# Altium PCB WifiAndLcd.PcbDoc
Units mil, origin at the board's own origin, x right, y up, seen from the top; angles counter-clockwise.
Board outline 4724.41 x 2913.39 mil, 2 copper layers (Top Layer, Bottom Layer); 130 components, 126 nets, 501 pads, 252 vias.
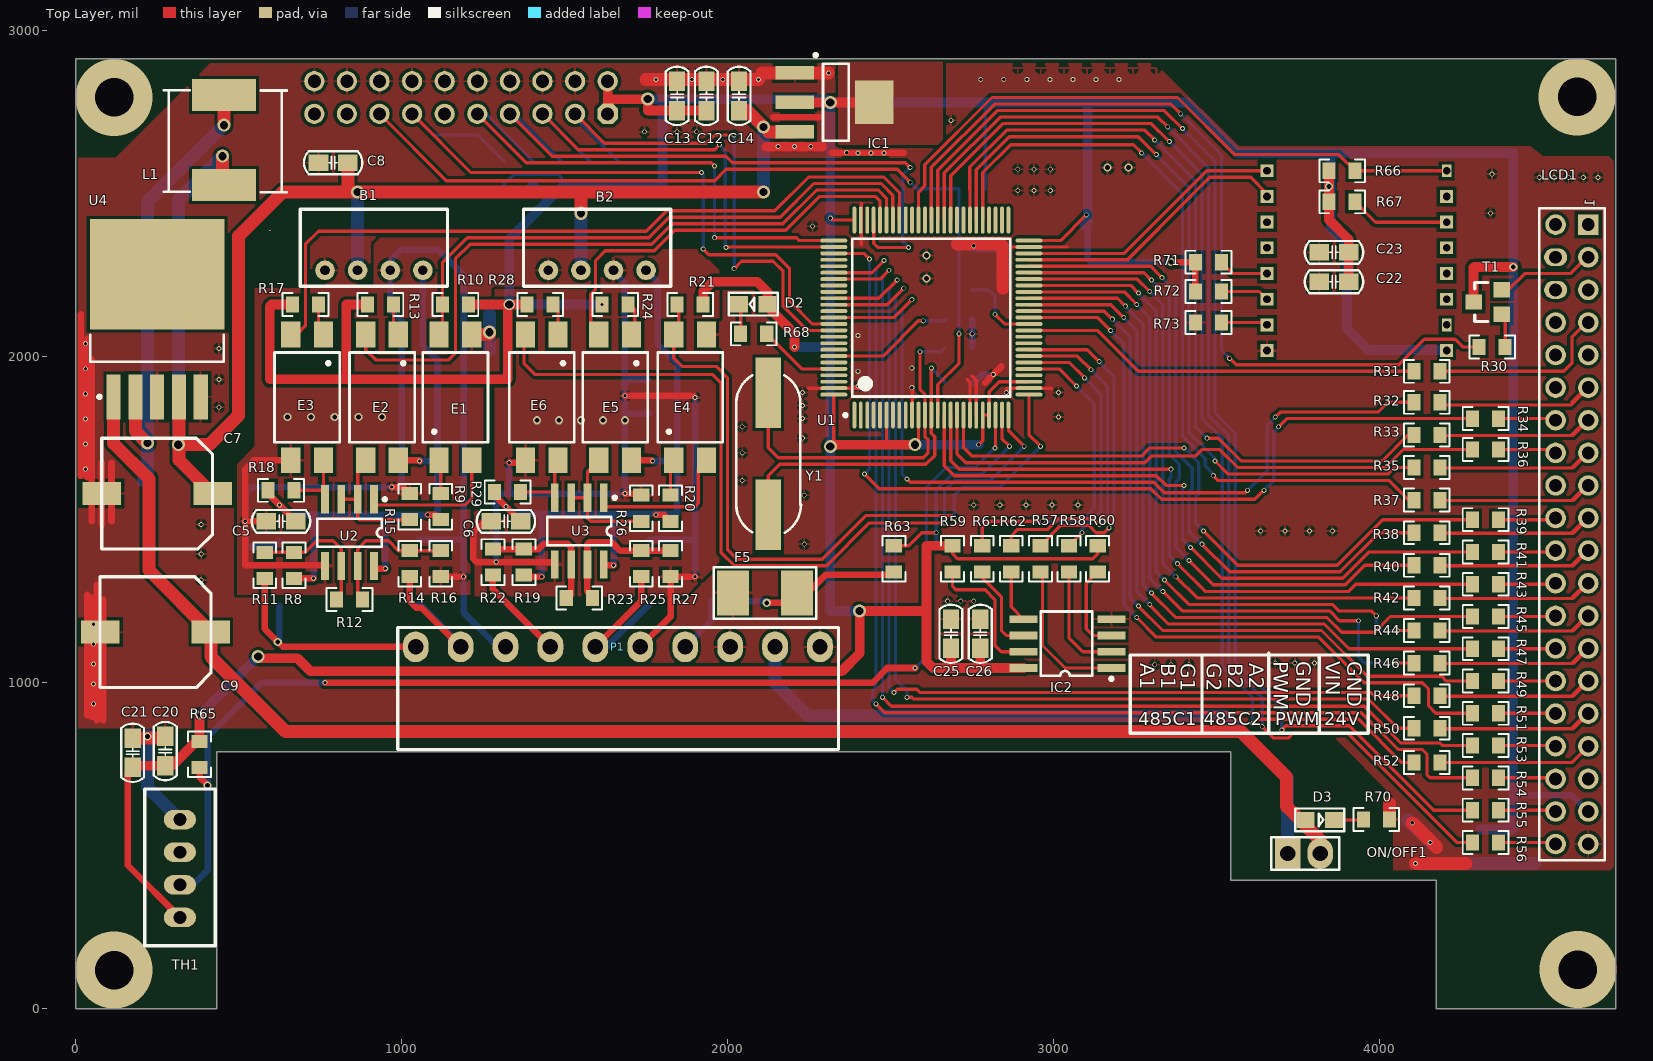
[diagram p0: Top Layer view]
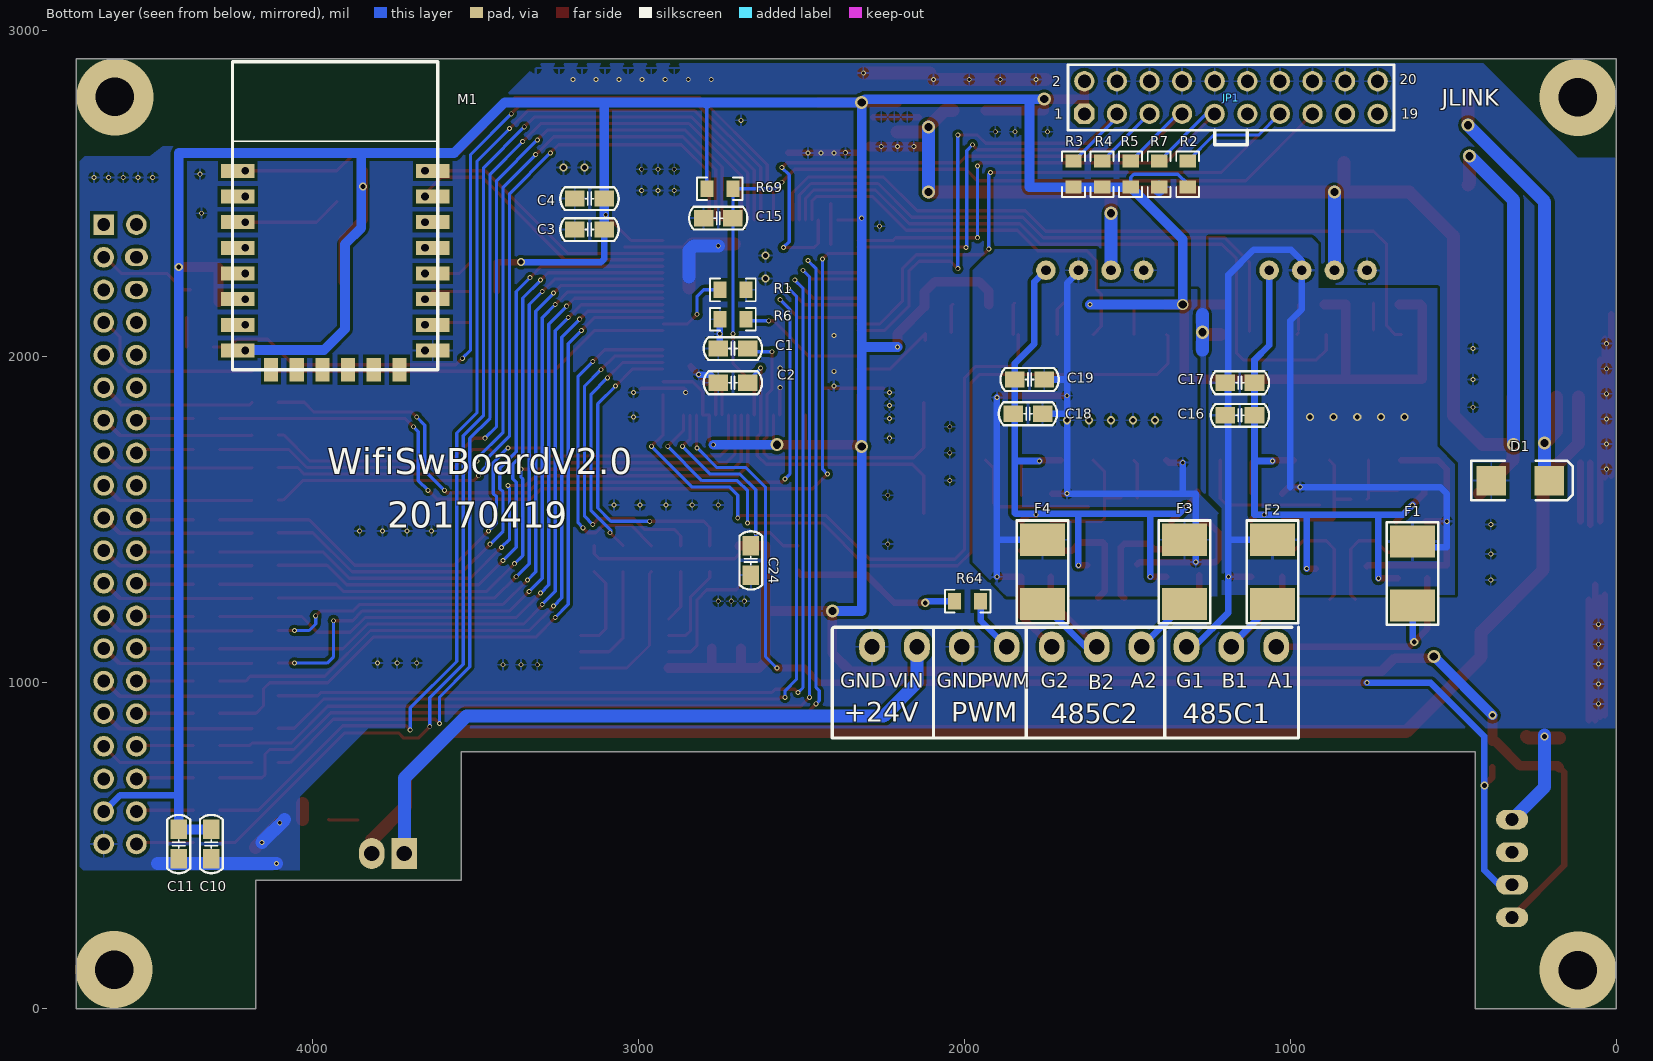
[diagram p1: Bottom Layer view, seen from below]

## Layer stack, top to bottom
Top Layer: signal copper 1.4
Dielectric: dielectric 12.6, FR-4, Dk 4.8
Bottom Layer: signal copper 1.4

## Board outline
0,0 0,2913.39 4724.41,2913.39 4724.41,0 4173.23,0 4173.23,393.7 3543.31,393.7 3543.31,787.4 433.07,787.4 433.07,0

## Design rules (kind name [scope] priority, off if disabled: settings)
Clearance [All] p1: gap=7
PlaneConnect [All] p1: planeconnectstyle=Direct reliefexpansion=20 reliefentries=4 reliefconductorwidth=10 reliefairgap=10
PolygonConnect [All] p1: connectstyle=Relief reliefconductorwidth=7 reliefentries=4 polygonreliefangle="90 Angle" airgapwidth=10
RoutingVias [All] p1: holewidth=28 width=50 viastyle="Through Hole" minholewidth=28 minwidth=50 maxholewidth=28 maxwidth=50
SilkToSolderMaskClearance SilkscreenOverComponentPads [IsPad] p1: minsilkscreentomaskgap=1 clearancetoexposedcopper=TRUE
SolderMaskExpansion [All] p1: expansion=4
Width [All] p1: maxlimit=40 minlimit=10 preferedwidth=10 minimp=50.000000 maximp=50.000000 favimp=50.000000
26 further rules are at their usual default settings.

## Classes and differential pairs
component class MAX485: C5 C6 E1 E2 E3 E4 E5 E6 F1 F2 F3 F4 R8 R9 R10 R11 R12 R13 R14 R15 R16 R17 R18 R19 R20 R21 R22 R23 R24 R25 R26 R27 R28 R29 U2 U3
component class STM_MCU: C1 C2 C3 C4 C15 D2 JP1 R1 R2 R3 R4 R5 R6 R7 R68 R69 U1 Y1
component class WifiAndPower: B1 B2 C7 C8 C9 C10 C11 C12 C13 C14 C16 C17 C18 C19 C20 C21 C22 C23 C24 C25 C26 D1 D3 F5 IC1 IC2 L1 LCD1 M1 ON/OFF1 P1 R30 R31 R32 R33 R34 R35 R36 R37 R38 R39 R40 R41 R42 R43 R44 R45 R46 R47 R48 R49 R50 R51 R52 R53 R54 R55 R56 R57 R58 R59 R60 R61 R62 R63 R64 R65 R66 R67 R70 R71 R72 R73 T1 TH1 U4

## Components (designator, comment, footprint, x,y, rotation, side; value= is the part's Value field where it differs from the comment)
B1 "B0505S" B0505S 765,2265 r90 top
B2 "B0505S" B0505S 1450,2265 r90 top
C1 "Cap" C0805 2710,2025 r180 bottom
C2 "Cap" C0805 2710,1920 r180 bottom
C3 "Cap" C0805 3150,2390 r0 bottom
C4 "Cap" C0805 3150,2485 r0 bottom
C5 "Cap" C0805 630,1495 r0 top
C6 "Cap" C0805 1320,1495 r0 top
C7 "Cap Pol1" PLAS8*10 250,1580 r0 top
C8 "Cap" C0805 790,2595 r0 top
C9 "Cap Pol1" PLAS8*10 245,1155 r0 top
C10 "Cap" C0805 4310,505 r270 bottom
C11 "Cap" C0805 4410,505 r270 bottom
C12 "Cap" C0805 1935,2800 r90 top
C13 "Cap" C0805 1845,2800 r90 top
C14 "Cap" C0805 2035,2800 r90 top
C15 "104" C0805 2755,2425 r180 bottom
C16 "Cap" C0805 1155,1820 r0 bottom
C17 "Cap" C0805 1155,1920 r0 bottom
C18 "Cap" C0805 1805,1825 r180 bottom
C19 "Cap" C0805 1800,1930 r180 bottom
C20 "Cap" C0805 275,790 r90 top
C21 "Cap" C0805 175,785 r90 top
C22 "Cap" C0805 3860,2230 r180 top
C23 "Cap" C0805 3860,2320 r180 top
C24 "Cap" C0805 2655,1375 r270 bottom
C25 "Cap" C0805 2685,1150 r90 top
C26 "Cap" C0805 2775,1150 r90 top
D1 "SK36B" SMB 295,1620 r180 bottom
D2 "SML-P12YTT86" D0805 2120,2160 r180 top (schematic designator D4)
D3 "SML-P12YTT86" D0805 3775,580 r0 top (schematic designator D4)
E1 "PS2501L-1" NEC2501 1165,1875 r0 top
E2 "PS2501L-1" NEC2501 940,1875 r180 top
E3 "PS2501L-1" NEC2501 710,1875 r180 top
E4 "PS2501L-1" NEC2501 1885,1875 r0 top
E5 "PS2501L-1" NEC2501 1655,1875 r180 top
E6 "PS2501L-1" NEC2501 1430,1875 r180 top
F1 "P6KE6.8CA" P6KE6,8CA 625,1335 r270 bottom
F2 "P6KE6.8CA" P6KE6,8CA 1055,1340 r90 bottom
F3 "SMBJ6.5CA" P6KE6,8CA 1325,1340 r270 bottom
F4 "SMBJ6.5CA" P6KE6,8CA 1760,1340 r90 bottom
F5 "P6KE6.8CA" P6KE6,8CA 2115,1275 r180 top
IC1 "LM1117" LM1117 2450,2780 r270 top
IC2 "W25Q16VSSIG" wsop8 3035,1115 r180 top
JP1 "HEADER 10X2" STM32-JLINK 1185,2790 r0 bottom
L1 "68uH" PCBH101 455,2665 r270 top
LCD1 "4.3TFT" 2.4TFT 4590,1455 r0 top locked
M1 "ESP-12E&F Module" "ESP-12E&F Module" 3930,2265 r180 bottom
ON/OFF1 "5.08-2" SensorA 3770,480 r0 top
P1 "Header 10" 3.5-10 3110,1110 r180 top
R1 "Res2" 0805 2710,2205 r270 bottom
R2 "Res Semi" 0805 1315,2560 r180 bottom
R3 "Res Semi" 0805 1665,2560 r180 bottom
R4 "Res Semi" 0805 1577.5,2560 r180 bottom
R5 "Res Semi" 0805 1490,2560 r180 bottom
R6 "Res2" 0805 2710,2115 r90 bottom
R7 "Res Semi" 0805 1402.5,2560 r0 bottom
R8 "10K" 0805 670,1360 r0 top
R9 "1K" 0805 1120,1540 r180 top
R10 "10K" 0805 1165,2160 r90 top
R11 "20" 0805 580,1360 r0 top
R12 "120" 0805 840,1255 r270 top
R13 "1K" 0805 935,2160 r270 top
R14 "20" 0805 1025,1365 r0 top
R15 "10K" 0805 1025,1540 r180 top
R16 "10K" 0805 1120,1365 r180 top
R17 "1K" 0805 705,2160 r270 top
R18 "10K" 0805 630,1590 r270 top
R19 "10K" 0805 1375,1370 r0 top
R20 "1K" 0805 1825,1535 r180 top
R21 "10K" 0805 1885,2160 r90 top
R22 "20" 0805 1280,1370 r0 top
R23 "120" 0805 1545,1260 r270 top
R24 "1K" 0805 1655,2160 r270 top
R25 "20" 0805 1735,1365 r0 top
R26 "10K" 0805 1735,1535 r180 top
R27 "10K" 0805 1825,1365 r180 top
R28 "1K" 0805 1425,2160 r270 top
R29 "10K" 0805 1325,1585 r270 top
R30 "Res2" 0805 4345,2030 r90 top
R31 "Res2" 0805 4145,1955 r90 top
R32 "Res2" 0805 4145,1860 r90 top
R33 "Res2" 0805 4145,1760 r90 top
R34 "Res2" 0805 4325,1810 r270 top
R35 "Res2" 0805 4145,1660 r90 top
R36 "Res2" 0805 4325,1715 r270 top
R37 "Res2" 0805 4145,1560 r90 top
R38 "Res2" 0805 4145,1460 r90 top
R39 "Res2" 0805 4325,1500 r270 top
R40 "Res2" 0805 4145,1360 r90 top
R41 "Res2" 0805 4325,1401 r270 top
R42 "Res2" 0805 4145,1260 r90 top
R43 "Res2" 0805 4325,1302 r270 top
R44 "Res2" 0805 4145,1160 r90 top
R45 "Res2" 0805 4325,1203 r270 top
R46 "Res2" 0805 4145,1060 r90 top
R47 "Res2" 0805 4325,1104 r270 top
R48 "Res2" 0805 4145,960 r90 top
R49 "Res2" 0805 4325,1005 r270 top
R50 "Res2" 0805 4145,860 r90 top
R51 "Res2" 0805 4325,906 r270 top
R52 "Res2" 0805 4145,755 r90 top
R53 "Res2" 0805 4325,807 r270 top
R54 "Res2" 0805 4325,708 r270 top
R55 "Res2" 0805 4325,609 r270 top
R56 "Res2" 0805 4325,510 r270 top
R57 "Res2" 0805 2960,1380 r0 top
R58 "Res2" 0805 3047,1380 r0 top
R59 "Res2" 0805 2690,1380 r180 top
R60 "Res2" 0805 3135,1380 r0 top
R61 "Res2" 0805 2781,1380 r180 top
R62 "Res2" 0805 2870,1380 r180 top
R63 "RES" 0805 2510,1380 r180 top
R64 "RES" 0805 1990,1250 r270 bottom
R65 "Res2" 0805 380,780 r180 top
R66 "Res2" 0805 3885,2570 r270 top
R67 "Res2" 0805 3885,2475 r270 top
R68 "Res Semi" 0805 2080,2070 r270 top
R69 "10K" 0805 2750,2515 r270 bottom
R70 "Res Semi" 0805 3990,580 r90 top
R71 "Res2" 0805 3475,2290 r90 top
R72 "Res2" 0805 3475,2200 r90 top
R73 "Res2" 0805 3475,2105 r90 top
T1 "NPN" 2N3904 4375,2205 r90 top
TH1 "DHT11" DHT11 320,280 r90 top
U1 "STM32F103VCT6" LQFP100_M 2625,2120 r90 top
U2 "MAX485EESA" NSO8 840,1460 r180 top
U3 "MAX485EESA" NSO8 1545,1465 r180 top
U4 "LM2596S-5.0" TS5B_M 250,2115 r0 top
Y1 "XTAL" CY 2125,1515 r90 top

## Footprints (in the part's own frame and the unit in brackets; to place one, negate y for a bottom-side part, rotate by r counter-clockwise, add the part's x,y. Pads: shape width x height; smd on the part's side, far side on the other; paste and mask are expansions set on the pad)
2.4TFT [mm]
  rect 1.6x1.6 hole 1: 1(1.27,24.13)
  round 1.6 hole 1: 2(-1.27,24.13) 3(1.27,21.59) 5(1.27,19.05) 7(1.27,16.51) 8(-1.27,16.51) 9(1.27,13.97) 10(-1.27,13.97) 11(1.27,11.43) 12(-1.27,11.43) 13(1.27,8.89) 14(-1.27,8.89) 15(1.27,6.35) 16(-1.27,6.35) 17(1.27,3.81) 18(-1.27,3.81) 19(1.27,1.27) 20(-1.27,1.27) 21(1.27,-1.27) 22(-1.27,-1.27) 23(1.27,-3.81) 24(-1.27,-3.81) 25(1.27,-6.35) 26(-1.27,-6.35) 27(1.27,-8.89) 28(-1.27,-8.89) 29(1.27,-11.43) 30(-1.27,-11.43) 31(1.27,-13.97) 32(-1.27,-13.97) 33(1.27,-16.51) 34(-1.27,-16.51) 35(1.27,-19.05) 36(-1.27,-19.05) 37(1.27,-21.59) 38(-1.27,-21.59) 39(1.27,-24.13) 40(-1.27,-24.13)
  oval 1.8x1.4 hole 1: 4(-1.27,21.59) 6(-1.27,19.05)
  silkscreen extent -2.54,-25.4 2.54,25.4
2N3904 [mm]
  rect 1.2x1.3 smd: 1(0,0) 2(-1.9,0) 3(-0.95,2.2)
  silkscreen extent -2.47,1.1 0.57,2.12
3.5-10 [mm]
  oval 2x2.4 hole 1.2: 1(52.5,0) 2(49,0) 3(45.5,0) 4(42,0) 5(38.5,0) 6(35,0) 7(31.5,0) 8(28,0) 9(24.5,0) 10(21,0)
  silkscreen extent 19.56,-1.5 53.9,8
0805 [mil]
  rect 50x40 smd: 1(0,40) 2(0,-40)
  silkscreen extent -35,-70 35,70
B0505S [mil]
  round 60 hole 30: 1(0,0) 2(0,-100) 3(0,-200) 4(0,-300)
  silkscreen extent -49,-376 187,76
C0805 [mil]
  rect 60x50 smd: 1(-45,0) 2(45,0)
  silkscreen extent -89,-35 89,35
CY [mm]
  rect 5.5x2 smd: 1(0,0) 2(9.5,0)
  silkscreen extent -1.4,-2.54 10.87,2.5
D0805 [mm]
  rect 1.4x1.27 smd: 1(-0.051,-0.026) 2(2.159,-0.026)
  silkscreen extent -0.85,-0.91 2.96,0.86
DHT11 [mm]
  oval 1.524x2.5 hole 1: 1(0,0) 2(2.54,0) 3(5.08,0) 4(7.62,0)
  silkscreen extent -2.2,-2.75 10,2.75
"ESP-12E&F Module" [mm]
  rect 2.6x1.1 smd: 1(-7.6,7.75) 2(-7.6,5.75) 3(-7.6,3.75) 4(-7.6,1.75) 5(-7.6,-0.25) 6(-7.6,-2.25) 7(-7.6,-4.25) 8(-7.6,-6.25) 15(7.6,-6.25) 16(7.6,-4.25) 17(7.6,-2.25) 18(7.6,-0.25) 19(7.6,1.75) 20(7.6,3.75) 21(7.6,5.75) 22(7.6,7.75)
  rect 0.762x1 hole 0.6: 1(-7,7.75) 7(-7,-4.25)
  rect 0.762x1 / inner rect 0.762x1 / far side rect 1x1 hole 0.6: 2(-7,5.75) 3(-7,3.75) 4(-7,1.75) 5(-7,-0.25) 6(-7,-2.25) 8(-7,-6.25) 15(7,-6.25) 16(7,-4.25) 17(7,-2.25) 18(7,-0.25) 19(7,1.75) 20(7,3.75) 21(7,5.75) 22(7,7.75)
  rect 1.1x1.8 smd: 9(-5,-7.75) 10(-3,-7.75) 11(-1,-7.75) 12(1,-7.75) 13(3,-7.75) 14(5,-7.75)
  silkscreen extent -8,-7.75 8,16.25
LM1117 [mm]
  rect 1.05x3 smd: 1(2.3,-6.2) 2(0,-6.2) 3(-2.3,-6.2)
  rect 3.4x3 smd: 4(0,0)
  silkscreen extent -3.81,-4.7 3,-2
LQFP100_M [mm]
  oval 2.1x0.3 smd: 1(-7.6,6) 2(-7.6,5.5) 3(-7.6,5) 4(-7.6,4.5) 5(-7.6,4) 6(-7.6,3.5) 7(-7.6,3) 8(-7.6,2.5) 9(-7.6,2) 10(-7.6,1.5) 11(-7.6,1) 12(-7.6,0.5) 13(-7.6,0) 14(-7.6,-0.5) 15(-7.6,-1) 16(-7.6,-1.5) 17(-7.6,-2) 18(-7.6,-2.5) 19(-7.6,-3) 20(-7.6,-3.5) 21(-7.6,-4) 22(-7.6,-4.5) 23(-7.6,-5) 24(-7.6,-5.5) 25(-7.6,-6) 51(7.6,-6) 52(7.6,-5.5) 53(7.6,-5) 54(7.6,-4.5) 55(7.6,-4) 56(7.6,-3.5) 57(7.6,-3) 58(7.6,-2.5) 59(7.6,-2) 60(7.6,-1.5) 61(7.6,-1) 62(7.6,-0.5) 63(7.6,0) 64(7.6,0.5) 65(7.6,1) 66(7.6,1.5) 67(7.6,2) 68(7.6,2.5) 69(7.6,3) 70(7.6,3.5) 71(7.6,4) 72(7.6,4.5) 73(7.6,5) 74(7.6,5.5) 75(7.6,6)
  oval 0.3x2.1 smd: 26(-6,-7.6) 27(-5.5,-7.6) 28(-5,-7.6) 29(-4.5,-7.6) 30(-4,-7.6) 31(-3.5,-7.6) 32(-3,-7.6) 33(-2.5,-7.6) 34(-2,-7.6) 35(-1.5,-7.6) 36(-1,-7.6) 37(-0.5,-7.6) 38(0,-7.6) 39(0.5,-7.6) 40(1,-7.6) 41(1.5,-7.6) 42(2,-7.6) 43(2.5,-7.6) 44(3,-7.6) 45(3.5,-7.6) 46(4,-7.6) 47(4.5,-7.6) 48(5,-7.6) 49(5.5,-7.6) 50(6,-7.6) 76(6,7.6) 77(5.5,7.6) 78(5,7.6) 79(4.5,7.6) 80(4,7.6) 81(3.5,7.6) 82(3,7.6) 83(2.5,7.6) 84(2,7.6) 85(1.5,7.6) 86(1,7.6) 87(0.5,7.6) 88(0,7.6) 89(-0.5,7.6) 90(-1,7.6) 91(-1.5,7.6) 92(-2,7.6) 93(-2.5,7.6) 94(-3,7.6) 95(-3.5,7.6) 96(-4,7.6) 97(-4.5,7.6) 98(-5,7.6) 99(-5.5,7.6) 100(-6,7.6)
  silkscreen extent -7.72,-6.15 6.15,6.82
NEC2501 [mm]
  rect 1.5x2 smd: 1(-1.27,-4.9) 2(1.27,-4.9) 3(1.27,4.9) 4(-1.27,4.9)
  silkscreen extent -2.54,-3.5 2.54,3.5
NSO8 [mm]
  rect 0.6x2.2 smd: 1(-1.905,-2.6) 2(-0.635,-2.6) 3(0.635,-2.6) 4(1.905,-2.6) 5(1.905,2.6) 6(0.635,2.6) 7(-0.635,2.6) 8(-1.905,2.6)
  silkscreen extent -2.88,-2.72 2.5,1.1
P6KE6,8CA [mm]
  rect 2.5x3.5 smd: 1(-2.5,0) 2(2.5,0)
  silkscreen extent -4,-2 4,2
PCBH101 [mm]
  rect 2.5x5 smd: 1(-3.5,0) 2(3.5,0)
  silkscreen extent -3.87,-4.7 7.08,4.9
PLAS8*10 [mm]
  rect 3x1.8 smd: 1(4.318,0) 2(-4.318,0)
  silkscreen extent -4.32,-4.32 4.32,4.32
SensorA [mm]
  rect 2x2.4 hole 1.2: 1(-1.32,-0.1)
  oval 2x2.4 hole 1.2: 2(1.22,-0.1)
  silkscreen extent -2.59,-1.37 2.68,1.17
SMB [mm] "DO-214-AA/SMB; 2 C-Bend Leads; Body 5.3 x 3.6 mm, inc. leads (LxW)"
  rect 2.3x2.3 smd: 1(-2.25,0) 2(2.25,0)
  silkscreen extent -3.8,-1.55 4.1,1.55
STM32-JLINK [mil]
  oct 62x62 hole 40: 1(447.05,45.08)
  round 62 hole 40: 2(447.05,-54.92) 3(347.05,45.08) 4(347.05,-54.92) 5(247.05,45.08) 6(247.05,-54.92) 7(147.05,45.08) 8(147.05,-54.92) 9(47.05,45.08) 10(47.05,-54.92) 11(-52.95,45.08) 12(-52.95,-54.92) 13(-152.95,45.08) 14(-152.95,-54.92) 15(-252.95,45.08) 16(-252.95,-54.92) 17(-352.95,45.08) 18(-352.95,-54.92) 19(-452.95,45.08) 20(-452.95,-54.92)
  silkscreen extent -503,-105 497,140
TS5B_M [mm]
  rect 1.1x3.5 smd: 1(-3.4,-6.05) 2(-1.7,-6.05) 3(0,-6.05) 4(1.7,-6.05) 5(3.4,-6.05)
  rect 10.5x8.6 smd: 6(0,3.5)
  silkscreen extent -5.2,-6.17 5.2,-1.2, body extent -5.2,-3.3 5.2,6.1, height 4.65
wsop8 [mm]
  rect 2.2x0.6 smd: 1(-3.616,1.778) 2(-3.616,0.508) 3(-3.616,-0.762) 4(-3.616,-2.032) 5(3.235,-2.032) 6(3.235,-0.762) 7(3.235,0.508) 8(3.235,1.778)
  silkscreen extent -3.74,-2.63 1.91,2.75

## Part data
C1 C2 C3 C4 C5 C6 C10 C11 C12 C13 C14 C16 C17 C18 C19 C20 C21 C22 C23 C24 C25 C26: "Capacitor"
C7 C9: "Polarized Capacitor (R"
C8 C15: library part Cap_2, "Capacitor"
D1: library part "D Schottky", "Schottky Diode"
D2 D3: "LED, GREEN SMD"
E1 E2 E3 E4 E5 E6: library part OPTO, "光?"
F1 F2 F3 F4 F5: library part TVS, "快速"
IC2: library part A
P1: "Header, 10-Pin"
R1 R6 R30 R31 R32 R33 R34 R35 R36 R37 R38 R39 R40 R41 R42 R43 R44 R45 R46 R47 R48 R49 R50 R51 R52 R53 R54 R55 R56 R57 R58 R59 R60 R61 R62 R65 R66 R67 R71 R72 R73: library part RES
R2 R3 R4 R5 R7 R68 R70: "Semiconductor Resistor"
R8 R9 R10 R11 R12 R13 R14 R15 R16 R17 R18 R19 R20 R21 R22 R23 R24 R25 R26 R27 R28 R29: library part RES2
R69: library part "Res Semi", "Semiconductor Resistor"
U1: library part STM32F103VBT6, "STM32 ARM-based 32-bit MCU with 64 Kbytes Flash, 100-pin LQFP, Industrial Temperature"
U2 U3: library part MAX485ESA, "Low-Power, Slew-Rate-Limited RS-485/RS-422 Transceiver"
U4: "Simple Switcher Power Converter 150 kHz 3A Step Down Voltage Reg"
Y1: "Crystal Oscillator"

## Via types
v1: diameter 15, hole 10, Top Layer to Bottom Layer, tented both sides, 209 vias
v2: diameter 25, hole 15, Top Layer to Bottom Layer, tented both sides, 22 vias
v3: diameter 40, hole 25, Top Layer to Bottom Layer, tented both sides, 15 vias
v4: diameter 236.22, hole 118.11, Top Layer to Bottom Layer, tented both sides, 4 vias
v5: diameter 15, hole 10, Top Layer to Bottom Layer, 1 vias
v6: diameter 35, hole 25, Top Layer to Bottom Layer, tented both sides, 1 vias

## Nets (pads, with @x,y where several pads share a name; then routed paths per layer and width w, separated by ;. In a path a pad name is that pad's centre, name@x,y a point inside that pad or via, vN(x,y) a via of type N, cw(c..) or ccw(c..) an arc to the next point about the centre after c; other vN are vias at no path point)
A1: F1.2 P1.1 R11.2 | length 754.5
  Top Layer w20: R11.2 580,1165 v2(620,1125) 635,1110 P1.1
  Bottom Layer w20: v2(620,1125) 625,1130 F1.2
A2: F3.2 P1.4 R22.2 | length 479.1
  Top Layer w20: R22.2 1280,1286.46 P1.4
  Bottom Layer w20: F3.2 1456.46,1110.12 P1.4
B1: F2.1 P1.2 R14.2 | length 472.6
  Top Layer w20: R14.2 1025,1250 1045,1230 1060.87,1230 P1.2
  Bottom Layer w20: F2.1 1180.87,1115.71 P1.2
B2: F4.1 P1.5 R25.2 | length 493.5
  Top Layer w20: P1.5 1735,1250.75 R25.2
  Bottom Layer w20: P1.5 1628.43,1110 F4.1
DB0: R56.2 U1.61 | length 3678.4
  Top Layer w10: U1.61 2664.37,2563.6 ; 2664.69,2563.6 2836.09,2735 3320,2735 v1(3350,2705) ; v1(3640,865) 3675,830 3720,830 3735.86,845.86 3900.86,845.86 4236.72,510 R56.2
  Bottom Layer w10: v1(3350,2705) 3475,2580 3475,1820.1 3537.5,1757.6 3537.5,1056.72 3640,954.22 v1(3640,865)
DB1: R55.2 U1.62 | length 3670.4
  Top Layer w10: U1.62 2644.69,2572.2 2827.49,2755 3340,2755 v1(3395,2700) ; v1(3700,855) 3712.5,867.5 3907.5,867.5 4166,609 R55.2
  Bottom Layer w10: v1(3395,2700) 3495,2600 3495,1828.39 3557.5,1765.89 3557.5,1065 3700,922.5 v1(3700,855)
DB2: R54.2 U1.81 | length 3509.3
  Top Layer w10: U1.81 2442.8,2257.8 v1(2480,2295) ; v1(2455,935) 2482.5,907.5 3944.22,907.5 4056.72,795 4131.21,795 4145,781.21 4145,718 4155,708 R54.2
  Bottom Layer w10: v1(2455,935) 2445,945 2445,975 2455,985 2455,2270 v1(2480,2295)
DB3: R53.2 U1.82 | length 3369.9
  Top Layer w10: U1.82 2468.11,2238.11 v1(2495,2265) ; v1(2475,955) 2502.5,927.5 3952.5,927.5 4065,815 4185,815 4193,807 R53.2
  Bottom Layer w10: v1(2475,955) 2475,2245 v1(2495,2265)
DB4: R51.2 U1.38 | length 2363
  Top Layer w10: U1.38 3135,2120 v1(3175,2080) ; v1(3255,1200) 3315,1140 3813.43,1140 3953.43,1000 4131.21,1000 4150,981.21 4150,928.79 4172.79,906 R51.2
  Bottom Layer w10: v1(3175,2080) 3215,2040 3215,1240 v1(3255,1200)
DB5: R49.2 U1.39 | length 2299.4
  Top Layer w10: U1.39 3155.31,2139.69 v1(3180,2115) ; v1(3260,1235) 3335,1160 3821.72,1160 3961.72,1020 4190,1020 4205,1005 R49.2
  Bottom Layer w10: v1(3180,2115) 3235,2060 3235,1260 v1(3260,1235)
DB6: R47.2 U1.40 | length 2268.4
  Top Layer w10: U1.40 3175.63,2159.37 v1(3215,2120) ; v1(3295,1240) 3295,1236.86 3351.86,1180 3830,1180 3906,1104 R47.2
  Bottom Layer w10: v1(3215,2120) 3255,2080 3255,1280 v1(3295,1240)
DB7: R45.2 U1.41 | length 2273.5
  Top Layer w10: U1.41 3195.94,2179.06 v1(3220,2155) ; v1(3300,1275) 3375,1200 3838.28,1200 3883.28,1155 3985,1155 4033,1203 R45.2
  Bottom Layer w10: v1(3220,2155) 3275,2100 3275,1300 v1(3300,1275)
DB8: R46.1 U1.42 | length 2185.5
  Top Layer w10: U1.42 3216.26,2198.74 v1(3255,2160) ; v1(3335,1280) 3395,1220 3846.57,1220 3876.57,1190 v1(3935,1190) ; v1(4055,1060) R46.1
  Bottom Layer w10: v1(3255,2160) 3295,2120 3295,1320 v1(3335,1280) ; v1(3935,1190) 3935,1080 3955,1060 v1(4055,1060)
DB9: R44.1 U1.43 | length 2102.5
  Top Layer w10: U1.43 3236.57,2218.43 v1(3260,2195) ; v1(3340,1315) 3415,1240 3854.85,1240 3874.85,1220 3975,1220 v1(3990,1205) ; v1(4055,1160) R44.1
  Bottom Layer w10: v1(3260,2195) 3315,2140 3315,1340 v1(3340,1315) ; v1(3990,1205) 3990,1180 4010,1160 v1(4055,1160)
DB10: R42.1 U1.44 | length 2051.6
  Top Layer w10: U1.44 3256.89,2238.11 v1(3295,2200) ; v1(3375,1325) 3440,1260 R42.1
  Bottom Layer w10: v1(3295,2200) 3335,2160 3335,1365 v1(3375,1325)
DB11: R40.1 U1.45 | length 2047.1
  Top Layer w10: U1.45 3277.2,2257.8 v1(3300,2235) ; v1(3415,1375) 3490,1300 3895,1300 3955,1360 R40.1
  Bottom Layer w10: v1(3300,2235) 3355,2180 3355,1700 3385,1670 3385,1625 3375,1615 3375,1415 v1(3415,1375)
DB12: R38.1 U1.46 | length 2034.2
  Top Layer w10: U1.46 3297.52,2277.48 v1(3332.5,2242.5) ; v1(3455,1425) 3540,1340 3878.43,1340 3998.43,1460 R38.1
  Bottom Layer w10: v1(3332.5,2242.5) 3375,2200 3375,1708.28 3425,1658.28 3425,1595 3415,1585 3415,1465 v1(3455,1425)
DB13: R37.1 U1.55 | length 2405.7
  Top Layer w10: U1.55 2782.48,2525 ; 2782.8,2525 2782.8,2565 2867.8,2650 3245,2650 v1(3270,2625) ; v1(3490,1635) 3505,1620 4030,1620 4090,1560 R37.1
  Bottom Layer w10: v1(3270,2625) 3395,2500 3395,1756.82 3465,1686.82 3465,1665 3490,1640 v1(3490,1635)
DB14: R35.1 U1.56 | length 2420.5
  Top Layer w10: U1.56 2762.8,2573.6 ; 2763.11,2573.6 2864.51,2675 3260,2675 v1(3315,2620) ; v1(3495,1680) 3535,1640 4025,1640 4045,1660 R35.1
  Bottom Layer w10: v1(3315,2620) 3415,2520 3415,1768.28 3495,1688.28 v1(3495,1680)
DB15: R33.1 U1.57 | length 2467.1
  Top Layer w10: 2742.8,2510 2742.8,2581.88 2855.91,2695 3280,2695 v1(3310,2665) ; U1.57 2743.11,2510 ; v1(3470.78,1750) 3505,1750 3575,1680 4008.43,1680 4088.43,1760 R33.1
  Bottom Layer w10: v1(3310,2665) 3435,2540 3435,1785.78 v1(3470.78,1750)
DE1: E2.2 U1.70 | length 2120.5
  Top Layer w10: E2.2 890,2020 920,1990 1145,1990 1165,2010 1165,2300 1210,2345 1766.57,2345 1829.57,2408 2169.72,2408 2272.96,2511.24 2462.04,2511.24 2486.89,2486.39 ; U1.70 2487.2,2486.39
DE2: E5.2 U1.71 | length 1261.7
  Top Layer w10: E5.2 1580,2092.91 1580,2191.21 1595,2206.21 1595,2295 1625,2325 1774.85,2325 1837.85,2388 2178,2388 2281.24,2491.24 2453.76,2491.24 2467.2,2477.8 ; 2467.2,2477.48 2467.2,2477.8 ; U1.71 2467.52,2477.48 2467.2,2477.8
DTH11_DAT: U1.67
DTH11DAT: R65.1 TH1.2 U1.23 | length 3784.2
  Top Layer w10: v1(2820,1720) 2821.85,1721.85 U1.23
  Top Layer w20: TH1.2@305,380 TH1.2 ; R65.1 380,710 v2(405,685) ; v1(765,1000) 2445,1000 2490,1045 v1(2575,1045)
  Bottom Layer w10: v1(2575,1045) 2610,1080 2610,1600 2670,1660 2760,1660 v1(2820,1720) v1@2822.5,1720
  Bottom Layer w20: TH1.2 360,380 405,425 v2(405,685) 405,835 570,1000 v1(765,1000)
ESP_RESET: M1.1 R66.1 U1.65 | length 1957
  Top Layer w10: U1.65 2585.63,2505 2604.69,2524.06 2604.69,2588.77 2810.92,2795 3380,2795 3555,2620 3875,2620 R66.1 4205.47,2570 M1.1@4205.59,2570.12
GND: B1.1 B2.1 C1.1 C2.1 C3.2 C4.2 C7.2 C8.1 C9.2 C10.2 C11.2 C12.2 C13.2 C14.2 C15.1 C20.2 C21.2 C22.2 C23.2 C24.2 C25.2 C26.2 D1.1 E1.3 E4.3 F5.2 IC1.3 IC2.4 JP1.4 JP1.6 JP1.8 JP1.10 JP1.12 JP1.14 JP1.16 JP1.18 JP1.20 LCD1.39 M1.15 P1.8 P1.10 R1.1 R6.1 R7.1 R70.2 R73.1 TH1.4 U1.10 U1.19 U1.20 U1.27 U1.49 U1.74 U1.99 U4.3 U4.5 | length 7396.5
  Top Layer w10: 2246.54,1903.46 U1.99 2433.46,1903.46 ; 2410,2345 2410,2470 ; v1(2565,1905) 2565.94,1904.06 U1.10 ; 2735,1930 2743.11,1921.89 U1.19 ; 2750,1940 2762.8,1927.2 U1.20 ; 2843.46,2336.54 U1.49 3041.54,2336.54 ; 2855,1900 2858.46,1903.46 U1.27 2991.54,1903.46 2995,1900
  Top Layer w20: 15,1635 15,2130 ; 35,900 35,1270 ; 35,1630 35,1732 35,2055.65 ; 50,895 50,1260 ; 50,1495 50,1990 ; 65,885 65,1155 65,1300 ; 80,1485 C7.2 80,1675 ; 85,885 85,1255 ; 110,1495 110,1675 ; 2140,2735 2280,2735 ; 2320,2625 v1(2400,2625) v1(2440,2625) v1(2480,2625) 2540,2625 ; 2790,1920 v1(2815,1945) 2840,1970
  Top Layer w30: 2118.78,2643.78 2205,2643.78 2288.78,2643.78 2290,2645
  Top Layer w40: C21.2 270,830 C20.2 ; E1.3 1270,2067.91 v3(1270,2075) ; 1750,2850 v1(1780,2850) v1(1890,2850) v1(1985,2850) v1(2095,2850) ; 2105,2870 v1(2310,2870) ; 2705,2345 2835,2345 2843.46,2336.54 2845,2335 2845,2210 ; R70.2 4030,630 ; v1(4100,570) 4175,495 ; v1(4110,445) 4265,445
  Bottom Layer w10: B2.1@1450,2260 B2.1
  Bottom Layer w20: C1.1@2750,2030 v1(2750,2070) R6.1 ; C2.1 2780,1945 v1(2815,1945)
  Bottom Layer w40: v2@220,840 v2(220,835) 220,680 TH1.4 ; 1270,2020 v3(1270,2075) 1270,2130 ; R7.1@1402.5,2512.5 R7.1 ; v1(2755,2340) 2830,2340 2845,2325 2845,2245 ; 4085,580 v1(4155,510) ; v1(4110,445) 4475,445
  other v1: 55,935 55,996 3310,1055 3360,1055 3415,1055 55,1057 3680,1060 3740,1060 3800,1060 55,1118 55,1179 2675,1250 2715,1250 2755,1250 385,1315 385,1395 2235,1425 3635,1465 3710,1465 3785,1465 3855,1465 385,1485 2755,1545 2835,1545 2915,1545 2995,1545 3075,1545 2235,1575 2045,1620 30,1655 2045,1705 30,1732 2230,1750 2045,1785 30,1809 2230,1810 3015,1815 440,1845 2230,1850 30,1886 2230,1890 2855,1890 3015,1890 2400,1910 440,1930 2400,1955 30,1963 2565,1965 440,2025 30,2040 2400,2065 2260,2400 4340,2440 2890,2510 2940,2510 2990,2510 4490,2550 4535,2550 4580,2550 4625,2550 4670,2550 4345,2560 2890,2575 2940,2575 2990,2575 2365.01,2625.81 2155,2645 2205,2645 2255,2645 1745,2690 1845,2690 1905,2690 2685,2725 2776.43,2850 2847.14,2850 2917.86,2850 2988.57,2850 3059.29,2850 3130,2850 3200.71,2850
  other v2: 2610,2240 2610,2310 3165,2580 3230,2580
GND_485-1: B1.3 C5.1 C16.2 C17.2 E3.3 F1.1 F2.2 P1.3 R15.2 R16.1 U2.5 | length 3950
  Top Layer w20: C5.1 v1(520,1495) ; E3.3 547.09,1682.09 520,1655 v1(520,1495) ; U2.5 762.64,1360 520,1360 v1(520,1495) ; v1(970,1600) 1005,1600 R15.2 ; R16.1 v1(1190,1325)
  Bottom Layer w20: F1.1 606.57,1415 520,1415 v1(520,1495) 520,1580 540,1600 v1(970,1600) ; 1000,1600 1000,2110 965,2145 B1.3 965,2295 997.86,2327.86 1112.86,2327.86 1190,2250.71 1190,1440 ; F2.2 1188.43,1438.43 1190,1440 ; P1.3 1295,1110 1190,1215 v1(1190,1325) 1190,1440
  other v2: 650,1815 722.5,1815 795,1815 867.5,1815 940,1815
GND_485-2: B2.3 C6.1 C18.2 C19.2 E6.3 F3.1 F4.2 P1.6 R26.2 R27.1 U3.5 | length 3305.3
  Top Layer w20: C6.1 1255,1495 1220,1460 1220,1380 1230,1370 v1(1290,1370) 1462.64,1370 U3.5 ; v1(1330,1675) 1372.91,1675 E6.3 ; v1(1685,1580) R26.2@1730,1580 ; v1(1685,1880) v1@1895,1880 ; P1.6 1825,1202.95 R27.1 v1(1900,1325)
  Bottom Layer w20: v1(1290,1370) 1290,1580 1330,1580 ; v1(1330,1675) 1330,1580 ; B2.3@1650,2260 1685,2225 v1(1685,1880) 1685,1830 ; 1690,1930 C19.2 ; F4.2 1898.43,1438.43 1900,1440 ; C18.2 1690,1825 1685,1830 ; v1(1900,1325) 1900,1440 ; 1900,1475 1900,1440 ; v1(1900,1875) 1900,1440 ; 1330,1580 v1(1685,1580) 1685,1830
  other v2: 1415,1805 1482.5,1805 1550,1805 1617.5,1805 1685,1805
JNTRST: JP1.3 R3.1 U1.90 | length 1610.9
  Top Layer w10: JP1.3 1621.97,2655 1935,2655 1960,2680 v1(2020,2680) ; v1(2020,2270) 2042.5,2292.5 2139.22,2292.5 2170,2261.72 2170,2155 2244.37,2080.63 U1.90
  Bottom Layer w10: JP1.3 1532.05,2732.95 R3.1 ; v1(2020,2270) v1(2020,2680)
JTCK: JP1.9 R7.2 U1.76 | length 1614.1
  Top Layer w10: JP1.9 1381.97,2595 1950,2595 v1(1960,2585) ; v1(1960,2365) 2211.22,2365 2220,2356.22 U1.76
  Bottom Layer w10: JP1.9 1257.58,2744.92 R7.2 ; v1(1960,2365) v1(1960,2585)
JTDI: JP1.5 R4.1 U1.77 | length 1450
  Top Layer w10: JP1.5 1541.97,2635 1960,2635 v1(1975,2650) ; v1@1996.54,2336.54 U1.77
  Bottom Layer w10: JP1.5 1432.58,2744.92 R4.1 ; v1(1975,2650) 1993.07,2631.93 v1@1993.07,2336.93
  other v1: 1995,2335
JTDO: JP1.13 R2.1 U1.89 | length 2097
  Top Layer w10: JP1.13 1211.97,2565 v1(1920,2565) ; v1(1925,2330) 1942.5,2312.5 2147.5,2312.5 2190,2270 2190,2170 2259.68,2100.32 U1.89
  Bottom Layer w10: JP1.13 1096.97,2680 1235,2680 R2.1 ; v1(1920,2565) 1925,2560 v1(1925,2330)
JTMS: JP1.7 R5.1 U1.72 | length 1960.1
  Top Layer w10: JP1.7 1461.97,2615 1995,2615 2015,2595 2545,2595 v1(2560,2580) ; U1.72 2447.83,2347.17 2460,2335 v1(2555,2335)
  Bottom Layer w10: JP1.7 1345.08,2744.92 R5.1 ; v1(2555,2335) 2537.5,2352.5 2537.5,2557.5 v1(2560,2580)
LCD_CS: R32.1 U1.88 | length 2600.2
  Top Layer w10: U1.88 2510,2120 v1(2565,2175) ; v1(2550,1625) 2560,1615 3306.72,1615 3339.22,1582.5 3587.5,1582.5 v1(3595,1590) ; v1(3680,1815) 3695,1830 3995,1830 4025,1860 R32.1
  Bottom Layer w10: v1(2550,1625) 2535,1640 2535,2145 v1(2565,2175) ; v1(3595,1590) 3655,1650 3655,1790 v1(3680,1815)
LCD_LED: R30.1 U1.63 | length 2654.4
  Top Layer w10: 2624.69,2545 2624.69,2580.48 2819.2,2775 3360,2775 v1(3390,2745) ; U1.63 2625,2545 ; v1@3535,2000 3560,1975 4058.79,1975 4137.41,2053.62 4231.49,2053.62 4255.11,2030 R30.1
  Bottom Layer w10: v1(3390,2745) 3515,2620 3515,2020 v1(3540,1995)
LCD_RD: R48.1 U1.85 | length 3106.4
  Top Layer w10: U1.85 2464.06,2179.06 v1(2520,2235) ; v1(2510,970) 2520,980 2580,980 2590,970 3973.28,970 3983.28,960 R48.1
  Bottom Layer w10: v1(2510,970) 2495,985 2495,2210 v1(2520,2235)
LCD_RS: R52.1 U1.60 | length 3341.2
  Top Layer w10: U1.60 2684.06,2525 ; 2684.37,2525 2684.37,2555 2844.37,2715 3300,2715 v1(3355,2660) ; v1(3610,875) 3622.5,887.5 3935.93,887.5 4068.43,755 R52.1
  Bottom Layer w10: v1(3355,2660) 3455,2560 3455,1811.82 3517.5,1749.32 3517.5,1048.43 3610,955.93 v1(3610,875)
LCD_RST: R31.1 U1.36 | length 1232.8
  Top Layer w10: U1.36 3134.37,2080.63 3260,1955 R31.1
LCD_WR: R50.1 U1.86 | length 3109.4
  Top Layer w10: U1.86 2489.37,2159.37 v1(2540,2210) ; v1(2550,955) 2565,955 2570,950 3965,950 4055,860 R50.1
  Bottom Layer w10: v1(2540,2210) 2515,2185 2515,1010 2550,975 v1(2550,955)
NetC1_2: C1.2 U1.12 Y1.2 | length 1047.2
  Top Layer w10: Y1.2@2125,1859.02 2125,1720 2155,1690 2600,1690 2615,1705 2615,1745 2605.32,1754.68 U1.12 2605.32,1884.68 2590,1900 v1(2590,2015)
  Bottom Layer w10: v1(2590,2015) 2655,2015 C1.2
NetC2_2: C2.2 U1.13 Y1.1 | length 984.6
  Top Layer w10: Y1.1@2125,1520 2125,1635 2160,1670 2608.28,1670 2635,1696.72 2635,1755 2625,1765 U1.13 v1(2625,1965)
  Bottom Layer w10: v1(2625,1965) 2665,1925 C2.2
NetD1_2: D1.2 L1.1 U4.2 | length 1442.9
  Top Layer w40: U4.2 183.07,1771.93 v3(220,1735) ; v3(455,2710) L1.1
  Bottom Layer w40: D1.2 220,1633.58 v3(220,1735) 220,2475 v3(455,2710)
NetD2_2: D2.2 R68.2 | length 88.1
  Top Layer w10: D2.2 2040,2156.01 R68.2@2040,2075
NetD3_2: D3.2 R70.1 | length 90.4
  Top Layer w10: D3.2 3948.99,578.99 R70.1
NetE1_1: E1.1 R9.2 | length 104.2
  Top Layer w10: E1.1 1120,1677.09 R9.2
NetE1_2: E1.2 U2.1 | length 430.4
  Top Layer w10: U2.1@910,1545 1195,1545 1215,1565 E1.2
NetE2_1: E2.1 R13.1 | length 84.2
  Top Layer w10: E2.1@975,2072.91 E2.1@980,2067.91 ; E2.1@975,2082.91 R13.1
NetE2_3: E2.3 R15.1 U2.2 U2.3 | length 395.4
  Top Layer w10: U2.3 U2.2 ; E2.3@880,1682.09 865,1667.09 U2.2 ; R15.1 870,1500 865,1505 U2.2
NetE3_1: E3.1 R17.1 | length 82.1
  Top Layer w10: E3.1@745,2082.91 R17.1 R17.1@745,2165
NetE3_4: E3.4 R18.1 U2.4 | length 213.9
  Top Layer w10: R18.1 755,1590 U2.4@760,1595 ; E3.4 U2.4@760,1595 ; U2.4 760,1567.36 U2.4@760,1595
NetE4_1: E4.1 R20.2 | length 111.2
  Top Layer w10: R20.2 1825,1672.09 E4.1
NetE4_2: E4.2 U3.1 | length 436.6
  Top Layer w10: U3.1@1620,1540 1900,1540 1910,1550 1910,1657.09 E4.2
NetE5_1: E5.1 R24.1 | length 105.4
  Top Layer w10: R24.1@1695,2165 1715,2145 E5.1@1715,2067.91
NetE5_3: E5.3 R26.1 U3.2 U3.3 | length 410.7
  Top Layer w10: U3.3 U3.2 ; E5.3 1570,1647.09 U3.2 ; R26.1 1580,1495 1570,1505 U3.2
NetE6_1: E6.1 R28.1 | length 103.3
  Top Layer w10: R28.1@1465,2165 1480,2150 E6.1
NetE6_4: E6.4 R29.1 U3.4 | length 223.9
  Top Layer w10: R29.1 U3.4@1470,1585 ; U3.4 1470,1672.09 E6.4
NetF5_1: F5.1 R63.1 R64.2 | length 521.4
  Top Layer w20: v2(2120,1245) 2215,1245 2301.57,1331.57 2501.57,1331.57 R63.1
  Bottom Layer w20: R64.2 2115,1250 v2(2120,1245)
NetIC2_1: IC2.1 R57.2 | length 468.4
  Top Layer w10: R57.2 2965.94,1334.05 2965.94,1114.05 3035,1045 IC2.1
NetIC2_2: IC2.2 R58.2 | length 350.2
  Top Layer w10: R58.2 3047,1138 3090,1095 IC2.2
NetIC2_3: IC2.3 R60.2 | length 275.1
  Top Layer w10: R60.2 3100,1305 3100,1165 3120,1145 IC2.3
NetIC2_5: IC2.5 R62.1 | length 160.6
  Top Layer w10: R62.1 2870,1232.64 IC2.5
NetIC2_6: IC2.6 R61.1 | length 278.3
  Top Layer w10: R61.1 2781,1322.28 2840,1263.28 2840,1160 2855,1145 IC2.6
NetIC2_7: IC2.7 R59.1 | length 427.5
  Top Layer w10: R59.1 2690,1295 2700,1285 2790,1285 2820,1255 2820,1115 2840,1095 IC2.7
NetLCD1_3: LCD1.3 T1.1 | length 308.5
  Top Layer w10: T1.1 4395,2205 4445,2255 4585,2255 LCD1.3@4640,2310
NetLCD1_7: LCD1.7 R31.2 | length 566.1
  Top Layer w10: R31.2 4565,1955 4590,1980 4590,2060 LCD1.7@4640,2110
NetLCD1_11: LCD1.11 R32.2 | length 551.4
  Top Layer w10: R32.2 4193.5,1851.5 4586.5,1851.5 LCD1.11 ; 4590,1860 LCD1.11@4640,1910
NetLCD1_13: LCD1.13 R33.2 | length 545.6
  Top Layer w10: R33.2 4186.5,1758.5 4593.5,1758.5 LCD1.13 ; 4590,1760 LCD1.13@4640,1810
NetLCD1_14: LCD1.14 R34.1 | length 175
  Top Layer w10: R34.1 LCD1.14@4540,1810
NetLCD1_15: LCD1.15 R35.2 | length 545.6
  Top Layer w10: R35.2 4186.5,1658.5 4593.5,1658.5 LCD1.15 ; 4590,1660 LCD1.15@4640,1710
NetLCD1_16: LCD1.16 R36.1 | length 177.1
  Top Layer w10: R36.1 4535,1715 LCD1.16@4540,1710
NetLCD1_17: LCD1.17 R37.2 | length 545.6
  Top Layer w10: R37.2 4186.5,1558.5 4593.5,1558.5 LCD1.17 ; 4590,1560 LCD1.17@4640,1610
NetLCD1_19: LCD1.19 R38.2 | length 545.6
  Top Layer w10: R38.2 4186.5,1458.5 4593.5,1458.5 LCD1.19 ; 4590,1460 LCD1.19@4640,1510
NetLCD1_20: LCD1.20 R39.1 | length 179.1
  Top Layer w10: R39.1 4530,1500 LCD1.20@4540,1510
NetLCD1_21: LCD1.21 R40.2 | length 545.6
  Top Layer w10: R40.2 4186.5,1358.5 4593.5,1358.5 LCD1.21 ; 4590,1360 LCD1.21@4640,1410
NetLCD1_22: LCD1.22 R41.1 | length 178.7
  Top Layer w10: R41.1 4531,1401 LCD1.22@4540,1410
NetLCD1_23: LCD1.23 R42.2 | length 545.6
  Top Layer w10: R42.2 4186.5,1258.5 4593.5,1258.5 LCD1.23 ; 4590,1260 LCD1.23@4640,1310
NetLCD1_24: LCD1.24 R43.1 | length 178.3
  Top Layer w10: R43.1 4532,1302 LCD1.24@4540,1310
NetLCD1_25: LCD1.25 R44.2 | length 545.6
  Top Layer w10: R44.2 4186.5,1158.5 4593.5,1158.5 LCD1.25 ; 4590,1160 LCD1.25@4640,1210
NetLCD1_26: LCD1.26 R45.1 | length 177.9
  Top Layer w10: R45.1 4533,1203 LCD1.26@4540,1210
NetLCD1_27: LCD1.27 R46.2 | length 545.6
  Top Layer w10: R46.2 4186.5,1058.5 4593.5,1058.5 LCD1.27 ; 4590,1060 LCD1.27@4640,1110
NetLCD1_28: LCD1.28 R47.1 | length 177.5
  Top Layer w10: R47.1 4534,1104 LCD1.28@4540,1110
NetLCD1_29: LCD1.29 R48.2 | length 545.6
  Top Layer w10: R48.2 4186.5,958.5 4593.5,958.5 LCD1.29 ; 4590,960 LCD1.29@4640,1010
NetLCD1_30: LCD1.30 R49.1 | length 177.1
  Top Layer w10: R49.1 4535,1005 LCD1.30@4540,1010
NetLCD1_31: LCD1.31 R50.2 | length 545.6
  Top Layer w10: R50.2 4186.5,858.5 4593.5,858.5 LCD1.31 ; 4590,860 LCD1.31@4640,910
NetLCD1_32: LCD1.32 R51.1 | length 176.7
  Top Layer w10: R51.1 4536,906 LCD1.32@4540,910
NetLCD1_33: LCD1.33 R52.2 | length 475.7
  Top Layer w10: R52.2 4590,755 LCD1.33
NetLCD1_34: LCD1.34 R53.1 | length 176.2
  Top Layer w10: R53.1 4537,807 LCD1.34@4540,810
NetLCD1_36: LCD1.36 R54.1 | length 175.8
  Top Layer w10: R54.1 4538,708 LCD1.36@4540,710
NetLCD1_38: LCD1.38 R55.1 | length 175.4
  Top Layer w10: R55.1 4539,609 LCD1.38@4540,610
NetLCD1_40: LCD1.40 R56.1 | length 175
  Top Layer w10: R56.1 LCD1.40@4540,510
NetM1_3: M1.3 R67.1 | length 306.4
  Top Layer w10: R67.1 3987.36,2412.64 M1.3@4205.59,2412.64
NetM1_16: M1.16 R73.2 | length 142.4
  Top Layer w10: R73.2 3647.09,2105 M1.16@3654.41,2097.68
NetM1_17: M1.17 R72.2 | length 149.2
  Top Layer w10: R72.2 3630.83,2200 M1.17@3654.41,2176.42
NetM1_18: M1.18 R71.2 | length 153.8
  Top Layer w10: R71.2 3549.84,2255.16 M1.18@3654.41,2255.16
NetR1_2: R1.2 U1.37 | length 249.8
  Top Layer w10: v1(2820,2130) 2849.68,2100.32 U1.37
  Bottom Layer w10: R1.2 2800,2205 2820,2185 v1(2820,2130)
NetR6_2: R6.2 U1.94 | length 391.1
  Top Layer w10: U1.94 2476.89,2001.89 2585,2110 v1(2600,2110)
  Bottom Layer w10: v1(2600,2110) 2665,2110 R6.2
NetR8_1: R8.1 R11.1 R12.2 U2.6 | length 421.1
  Top Layer w10: R11.1 R8.1 705,1400 740,1435 790,1435 815,1410 U2.6 815,1270 R12.2
NetR12_1: R12.1 R14.1 R16.2 U2.7 | length 439
  Top Layer w10: R12.1 865,1270 U2.7 865,1410 890,1435 960,1435 990,1405 R14.1 R16.2
NetR19_1: R19.1 R22.1 R23.2 U3.6 | length 410.3
  Top Layer w20: R22.1 R19.1 1420,1410 1435.95,1425.95 1509.05,1425.95 1520,1415 U3.6 1520,1270 R23.2@1510,1260
NetR23_1: R23.1 R25.1 R27.2 U3.7 | length 440.7
  Top Layer w20: R23.1@1590,1260 1570,1280 U3.7 1570,1425 1575,1430 1645,1430 1670,1405 R25.1 R27.2
NetR30_2: R30.2 T1.2 | length 90.2
  Top Layer w10: R30.2 T1.2@4385,2120.2
NetR68_1: R68.1 U1.96 | length 323.3
  Top Layer w10: R68.1@2120,2050 R68.1 2227.48,1962.52 ; 2280.48,1962.52 2227.48,1962.52 ; U1.96 2227.48,1962.52
PWM_IN: C24.1 R63.2 U1.24 | length 710.2
  Top Layer w10: R63.2 2555,1420 2595,1460 v1(2640,1460) ; U1.24 2841.54,1748.46 v1(2865,1725)
  Bottom Layer w10: C24.1 2640,1435 v1(2640,1460) 2640,1591.72 2688.28,1640 2780,1640 v1(2865,1725)
PWM_SIG: P1.7 R64.1 | length 173.2
  Bottom Layer w20: P1.7 1950,1190.16 R64.1
RESET: C15.2 JP1.15 R69.1 U1.14 | length 2628.4
  Top Layer w10: JP1.15 1136.97,2540 1960,2540 1995,2575 2520,2575 v1(2560,2535) ; U1.14 2644.69,1914.69 2710,1980 v1@2710,2075
  Bottom Layer w10: v1(2560,2535) 2580,2515 R69.1 C15.2 v1(2710,2070)
SPI1_MISO: R58.1 U1.31 | length 771.3
  Top Layer w10: U1.31 3047.8,1982.2 v1(3095,1935) ; R58.1 v1(3087,1460) v1@3090,1460
  Bottom Layer w10: v1(3087,1460) 3085,1462 3085,1467.5 3145,1527.5 3145,1885 v1(3095,1935)
SPI1_MOSI: R62.2 U1.32 | length 1043.2
  Top Layer w10: R62.2 2870,1450 2890,1470 2981.72,1470 3014.22,1502.5 3122.5,1502.5 v1(3140,1485) ; U1.32 3073.11,2001.89 v1(3115,1960)
  Bottom Layer w10: v1(3115,1960) 3165,1910 3165,1510 v1(3140,1485)
SPI1_SCK: R61.2 U1.30 | length 989.3
  Top Layer w10: R61.2 2781,1476 2800,1495 v1(2965,1495) ; U1.30 3017.48,1962.52 v1(3070,1910)
  Bottom Layer w10: v1(2965,1495) 3084.22,1495 3125,1535.78 3125,1855 v1(3070,1910)
STM_RX1: E1.4 R10.1 U1.69 | length 1783.6
  Top Layer w10: E1.4@1125,2077.91 R10.1 1125,2288.28 1201.72,2365 1758.28,2365 1821.28,2428 2161.43,2428 2264.67,2531.24 2470.64,2531.24 2506.57,2495.31 ; U1.69 2506.89,2495.31
STM_RX2: E4.4 R21.1 U1.26 | length 2225
  Top Layer w10: E4.4 1835,1995 1860,1970 1965,1970 1999.53,1935.47 1999.53,1408.76 2029.39,1378.9 2290,1378.9 2423.6,1512.5 2687.5,1512.5 v1(2695,1505) ; R21.1@1845,2165 1850,2160 E4.4@1850,2067.91 ; U1.26 2924.21,1760.79 v1(2960,1725)
  Bottom Layer w10: v1(2695,1505) 2695,1575 2720,1600 2835,1600 v1(2960,1725)
STM_RX3: M1.22 U1.48 | length 835.1
  Top Layer w10: U1.48 3216.85,2316.85 3470.12,2570.12 M1.22@3654.41,2570.12
STM_TX1: E3.2 U1.68 | length 2317.7
  Top Layer w10: E3.2 677.91,2067.91 705,2095 705,2345 745,2385 1750,2385 1813,2448 2145,2448 2248.24,2551.24 2479.24,2551.24 2526.89,2503.59 2526.89,2470 ; U1.68 2526.57,2470
STM_TX2: E6.2 U1.25 | length 2511.9
  Top Layer w10: E6.2 1375,2062.91 1375,1980 1410,1945 1954.53,1945 1979.53,1920 1979.53,1400.47 2021.1,1358.9 2303.9,1358.9 2435,1490 v1(2665,1490) ; U1.25 2861.22,1773.78 v1(2910,1725)
  Bottom Layer w10: v1(2665,1490) 2665,1588.43 2696.57,1620 2805,1620 v1(2910,1725)
STM_TX3: M1.21 U1.47 | length 1142.3
  Top Layer w10: U1.47 3227.17,2297.17 3421.38,2491.38 3419.66,2491.38 ; 3225.76,2297.48 3419.66,2491.38 ; M1.21@3654.41,2491.38 3654.41,2500.59 3604.88,2550.12 3478.4,2550.12 3419.66,2491.38
T_CLK: R43.2 U1.16 | length 2078.3
  Top Layer w10: U1.16 2684.06,1680.94 2710,1655 v1(3360,1655) ; v1(3380,1365) 3465,1280 3905,1280 3927,1302 R43.2
  Bottom Layer w10: v1(3360,1655) 3360,1630 3355,1625 3355,1390 v1(3380,1365)
T_CS: R41.2 U1.15 | length 2056.2
  Top Layer w10: U1.15 2664.37,1665.63 2695,1635 3315,1635 3345,1605 v1(3400,1605) ; v1(3420,1415) 3515,1320 3886.72,1320 3967.72,1401 R41.2
  Bottom Layer w10: v1(3400,1605) 3400,1600 3395,1595 3395,1440 v1(3420,1415)
T_DIN: R39.2 U1.18 | length 2011.8
  Top Layer w10: U1.18 2723.43,1721.57 2750,1695 3270,1695 3295,1720 v1(3400,1720) ; v1(3460,1465) 3565,1360 3870,1360 4010,1500 R39.2
  Bottom Layer w10: v1(3400,1720) 3445,1675 3445,1580 3435,1570 3435,1490 v1(3460,1465)
T_DO: R36.2 U1.17 | length 1773.8
  Top Layer w10: U1.17 2703.74,1701.26 2730,1675 3280,1675 3300,1695 3435,1695 3455,1715 3510,1715 3565,1660 4016.72,1660 4071.72,1715 R36.2
T_IRQ: R34.2 U1.78 | length 2869.9
  Top Layer w10: U1.78 2418.15,2316.85 v1(2435,2300) ; v1(2420,1640) 2465,1595 3298.43,1595 3330.93,1562.5 3617.5,1562.5 v1(3645,1590) ; v1(3690,1785) 3715,1810 R34.2
  Bottom Layer w10: v1(2420,1640) 2435,1655 v1(2435,2300) ; v1(3645,1590) 3675,1620 3675,1770 v1(3690,1785)
VCC_485-1: B1.4 C5.2 C16.1 C17.1 E2.4 R8.2 R9.1 R18.2 U2.8 | length 2012.8
  Top Layer w20: R18.2 590,1580 v1(625,1545) C5.2 ; R8.2 v1(730,1320) ; U2.8@922.64,1350 v1(950,1350) ; E2.4 1052.91,1682.09 v1(1055,1680) ; v1(1080,1515) 1105,1515 R9.1
  Bottom Layer w20: v1(625,1545) 655,1515 730,1515 ; v1(730,1320) 730,1515 ; v1(950,1350) 950,1510 955,1515 ; v1(1055,1680) 1110,1680 ; B1.4 1065,2035 1110,1990 C17.1 C16.1 1110,1680 ; 730,1515 955,1515 ; 955,1515 v1(1080,1515) 1110,1515 1110,1680
VCC_485-2: B2.4 C6.2 C18.1 C19.1 E5.4 R19.2 R20.1 R29.2 U3.8 | length 2059.5
  Top Layer w20: R29.2 1285,1575 v1(1320,1540) C6.2 ; R19.2@1380,1325 v1(1430,1325) ; U3.8@1622.64,1360 v1(1650,1360) ; E5.4 v1@1767.91,1682.09 ; v1(1780,1515) 1805,1515 R20.1
  Bottom Layer w20: v1(1320,1540) 1342.36,1517.64 1430,1517.64 ; v1(1430,1325) 1430,1517.64 ; v1(1650,1360) 1650,1517.64 ; B2.4@1750,2260 1755,2260 1785,2230 1785,2040 1845,1980 C19.1 1845,1680 ; v1(1770,1680) 1845,1680 ; 1430,1517.64 1650,1517.64 ; 1650,1517.64 1842.64,1517.64 1845,1520 1845,1680
VDD3.3V: C3.1 C4.1 C10.1 C11.1 C12.1 C13.1 C20.1 C21.1 C22.1 C23.1 C25.1 C26.1 D2.1 IC1.2 IC1.4 IC2.8 JP1.1 JP1.2 LCD1.37 M1.8 R2.2 R3.2 R4.2 R5.2 R10.2 R13.2 R17.2 R21.2 R24.2 R28.2 R59.2 R60.1 R65.2 R66.2 R67.2 R69.2 R71.1 R72.1 T1.3 TH1.1 U1.6 U1.11 U1.21 U1.22 U1.28 U1.50 U1.75 U1.100 | length 20056.8
  Top Layer w10: v3(2315,1725) 2320,1730 2325.79,1735.79 U1.100 ; v1(2315,2425) 2320.79,2419.21 U1.75 ; 2485,1730 2487.2,1732.2 U1.6 ; v3@2580,1730 2585.63,1735.63 U1.11 ; R59.2 2690,1395 2705,1380 3120,1380 3135,1395 R60.1 ; v1(2770,1730) 2782.48,1742.48 U1.21 U1.22 2802.17,1892.17 2833.15,1923.15 ; 2833.46,1923.46 2833.15,1923.15 ; U1.28 2833.15,1923.15 ; U1.50 3021.22,2356.22 v1(3100,2435)
  Top Layer w20: C21.1 160,725 160,440 TH1.1 ; v2(3360,2290) R71.1 R72.1
  Top Layer w30: C21.1 180,745 C20.1 295,745 370,820 R65.2 v2(380,900) ; v3(560,1080) 565,1075 680,1075 720,1035 2350,1035 2405,1090 v3(2405,1220) 2610,1220 ; R17.2 600.94,2160 595.47,2154.53 595.47,1930.47 1325.47,1930.47 1325.47,2155.47 v6(1330,2160) ; 830,1935.47 830,2160 R13.2 ; R10.2 v6(1330,2160) ; R28.2 v6(1330,2160) ; JP1.1 1632.05,2795 ; JP1.2 1632.05,2795 ; R21.2 1925,2200 1955,2230 2090,2230 2122.01,2197.99 D2.1 2122.01,2153.35 2205,2070.36 v1(2205,2030) ; C12.1 C13.1 1755,2755 v3(1755,2790) 1637.05,2790 1632.05,2795 ; IC1.2 v3(2315,2780) IC1.4 ; v3@2320,1730 2485,1730 v3(2575,1730) v3@2580,1730 ; 2685,1055 C25.1 ; R59.2 2610,1420 2610,1220 ; C26.1 2775,1050 2770,1045 ; IC2.8 2770,1045 ; R66.2 v2(3845,2522.5) R67.2 3845,2420 3905,2360 C23.1 C22.1 ; T1.3 4288.39,2273.39 4290,2275 v2(4410,2275) ; 2610,1220 2610,1065 2630,1045 2770,1045
  Bottom Layer w10: R2.2 1315,2530 1345,2560 1480,2560 1490,2550 R5.2 ; R69.2 2790,2775
  Bottom Layer w20: C3.1 3105,2300 3115,2290 v2(3360,2290) ; 4410,655 4590,655 LCD1.37
  Bottom Layer w30: v2(380,900) v3(560,1080) ; v5(1615,2160) v6(1330,2160) 1330,2360 R5.2 R4.2 R3.2 1800,2520 1800,2790 ; v3(1755,2790) 1800,2790 ; v1(2205,2030) 2315,2030 ; v3(2405,1220) 2315,1220 v3(2315,1725) 2315,2030 ; v3(2575,1730) v1(2770,1730) ; 2790,2775 2795,2780 ; C3.1@3095,2400 3105,2410 C4.1 3105,2780 ; M1.8@4205.59,2018.94 4204.21,2020.32 3964.68,2020.32 3900,2085 3900,2345 3850,2395 3850,2625 ; C10.1 C11.1 4410,655 v2(4410,2275) 4410,2625 3850,2625 ; 1800,2790 2305,2790 v3(2315,2780) ; 2315,2030 v1(2315,2425) v3(2315,2780) ; v3(2315,2780) 2795,2780 ; 2795,2780 3410,2780 3565,2625 3850,2625
VDD5V: B1.2 B2.2 C7.1 C8.2 C14.1 IC1.1 L1.2 U4.4 | length 4755.4
  Top Layer w40: U4.4 v3@316.93,1730 ; C7.1 316.93,1683.07 316.93,1728.07 v3(315,1730) v3@316.93,1730 ; v3(450,2615) 450,2532.2 L1.2 ; C8.2 835,2505 ; v3(1550,2440) 1550,2505 ; C14.1 2060,2755 v3(2110,2705) ; v3(2110,2505) 1550,2505 ; 2125.55,2689.45 IC1.1 ; v3@316.93,1730 410,1730 500,1820 500,2370 635,2505 835,2505 ; 835,2505 v3(865,2505) 1550,2505
  Bottom Layer w40: v3(315,1730) 315,2480 v3(450,2615) ; B1.2 v3(865,2505) ; B2.2 v3(1550,2440) ; v3(2110,2505) v3(2110,2705)
VIN: ON/OFF1.1 P1.9 | length 2035.1
  Bottom Layer w40: P1.9 2145.43,999.57 2247.5,897.5 3527.5,897.5 3718.03,706.97 ON/OFF1.1
VINPUT: C9.1 D3.1 ON/OFF1.2 U4.1 | length 4650.5
  Top Layer w40: U4.1 116.14,1733.86 225,1625 225,1345 C9.1 415,1080 645,850 3575,850 3715,710 3715,620 3818.03,516.97 ON/OFF1.2
W25X16_CS: R57.1 U1.33 | length 1017.2
  Top Layer w10: U1.33 3103.43,2021.57 v1(3140,1985) ; R57.1 3022.5,1482.5 3107.5,1482.5 3130,1460 3155,1460 v1(3170,1475)
  Bottom Layer w10: v1(3140,1985) 3185,1940 3185,1490 v1(3170,1475)
pads on no net: JP1.11 JP1.17 JP1.19 LCD1.1 LCD1.2 LCD1.4 LCD1.5 LCD1.6 LCD1.8 LCD1.9 LCD1.10 LCD1.12 LCD1.18 LCD1.35 M1.2 M1.4 M1.5 M1.6 M1.7 M1.9 M1.10 M1.11 M1.12 M1.13 M1.14 M1.19 M1.20 TH1.3 U1.1 U1.2 U1.3 U1.4 U1.5 U1.7 U1.8 U1.9 U1.29 U1.34 U1.35 U1.51 U1.52 U1.53 U1.54 U1.58 U1.59 U1.64 U1.66 U1.73 U1.79 U1.80 U1.83 U1.84 U1.87 U1.91 U1.92 U1.93 U1.95 U1.97 U1.98 U4.6
copper on no net:
  other v4: 118.1,118.1 4608.11,119.92 118.11,2795.28 4605.51,2796.69

## Polygon pours and split planes (outlines as drawn)
GND on Bottom Layer "Bottom Layer-No Net" (solid, remove dead copper, pour order 14): 3.5,860 3828.5,860 4038.5,650 4038.5,425 4703.5,425 4713.5,435 4713.5,2600 4698.5,2615 4498.5,2615 4458.5,2645 3563.5,2645 3308.5,2900 408.5,2900 118.5,2610 3.5,2610
GND_485-1 on Bottom Layer "Top Layer-No Net" (solid, remove dead copper, pour order 10): 550,2210 915,2210 915,2345 930,2360 935,2365 1250,2365 1250,1575 1210,1535 1210,1270 495,1270 495,1330 495,1670 545,1720 550,1725 550,2210
GND_485-2 on Bottom Layer "Top Layer-No Net" (solid, remove dead copper, pour order 13): 1600,2330 1875,2330 1910,2330 1955,2285 1975,2265 1975,2025 1975,1370 1880,1275 1870,1265 1225,1265 1225,1515 1220,1520 1285,1585 1285,1815 1285,2205 1286.21,2206.21 1595,2206.21 1595,2330
GND on Top Layer "Bottom Layer-No Net" (solid, remove dead copper, pour order 12): 7.42,859.75 3832.42,859.75 4042.42,649.75 4042.42,424.75 4707.42,424.75 4717.42,434.75 4717.42,2599.75 4702.42,2614.75 4502.42,2614.75 4462.42,2644.75 3567.42,2644.75 3312.42,2899.75 412.42,2899.75 122.42,2609.75 7.42,2609.75
VDD3.3V on Top Layer "Top Layer-No Net" (solid, remove dead copper, pour order 8): 2340,2905 2660,2905 2660,2655 2655,2650 2490,2650 2345,2650 2340,2645
GND_485-1 on Top Layer "Top Layer-No Net" (solid, remove dead copper, pour order 9): 550,2210 915,2210 915,2345 930,2360 935,2365 1250,2365 1250,1575 1210,1535 1210,1270 495,1270 495,1330 495,1670 545,1720 550,1725 550,2210
GND_485-2 on Top Layer "Top Layer-No Net" (solid, remove dead copper, pour order 11): 1600,2330 1875,2330 1910,2330 1955,2285 1975,2265 1975,2025 1975,1370 1880,1275 1870,1265 1225,1265 1225,1515 1220,1520 1285,1585 1285,1815 1285,2205 1286.21,2206.21 1595,2206.21 1595,2330

## Silkscreen, mask and mechanical layers (free items; w line width, h text height)
Top Overlay:
  lines w10: 3455,845 3455,1085 ; 3660,850 3660,1090 ; 3815,845 3815,1085 ; 3235,845 3965,845 3965,1085 3235,1085 3235,845
  text "PWM" at 3675,1065 h45 r270
  text "GND" at 3745,1065 h45 r270
  text "VIN" at 3835,1065 h45 r270
  text "GND" at 3900,1065 h45 r270
  text "A1" at 3265,1060 h45 r270
  text "B1" at 3330,1060 h45 r270
  text "G1" at 3390,1060 h45 r270
  text "G2" at 3470,1060 h45 r270
  text "B2" at 3535,1060 h45 r270
  text "A2" at 3600,1060 h45 r270
  text "485C1" at 3260,870 h40
  text "485C2" at 3460,870 h40
  text "PWM" at 3680,870 h40
  text "24V" at 3830,870 h40
Bottom Overlay:
  lines w10: 975,1170 975,830 2405,830 2405,1165 2400,1170 995,1170 ; 1385,830 1385,1170 ; 1810,830 1810,1170 ; 2095,830 2095,1170
  text "JLINK" at 535,2770 h50
  text "WifiSwBoardV2.0" at 3955,1640 h80
  text "20170419" at 3770,1475 h80
  text "A1" at 1070,985 h45
  text "B1" at 1210,985 h45
  text "G1" at 1350,985 h45
  text "A2" at 1490,985 h45
  text "G2" at 1765,985 h45
  text "PWM" at 1950,985 h45
  text "GND" at 2085,985 h45
  text "VIN" at 2230,985 h45
  text "GND" at 2380,985 h45
  text "B2" at 1620,980 h45
  text "PWM" at 2040,880 h60
  text "+24V" at 2370,880 h60
  text "485C1" at 1330,875 h60
  text "485C2" at 1735,875 h60
Mechanical 1:
  the board outline again, w10

## Text inside footprints (layer, text, board x,y; h text height)
JP1: Bottom Overlay "20" at 665,2835 h30; Bottom Overlay "19" at 660,2730 h30; Bottom Overlay "2" at 1730,2830 h30; Bottom Overlay "1" at 1725,2730 h30
LCD1: Top Overlay "1" at 4660,2485 h30 r90